# Altium PCB amino.PcbDoc (part 2 of 2)
Units mm, origin at the board's own origin, x right, y up, seen from the top; angles counter-clockwise.
Board outline 13 x 15 mm, 6 copper layers (L1 - SIG, L2 - GND, L3 - SIG, L4 - SIG, L5 - PWR, L6 - SIG), stack 0.739 mm thick; 48 components, 68 nets, 298 pads, 81 vias.
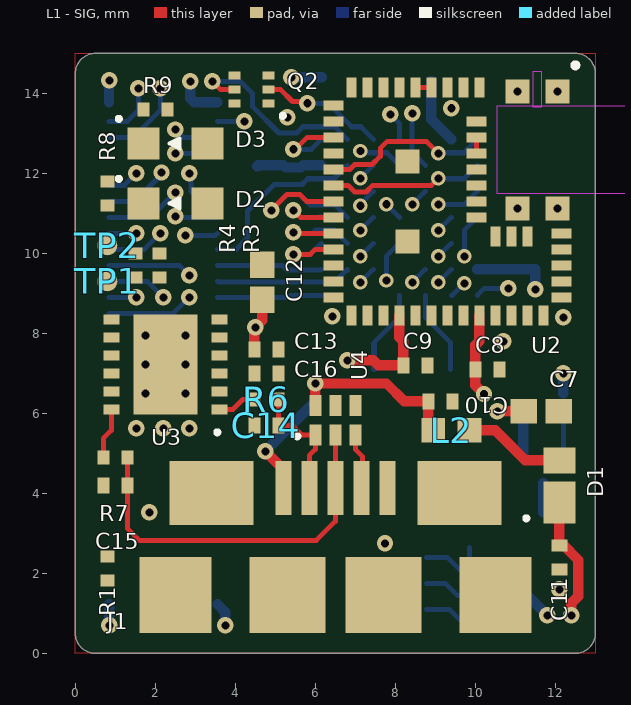
[diagram p0: L1 - SIG view]

## Part data (continued)
U4: "IC 4CH ESD SOLUTION W/CLAMP 6SON", Breakdown Voltage=24V, Capacitance=15pF, Manufacturer="Texas Instruments", Max Operating Temperature=85°C, Max Power Dissipation=60W, Min Breakdown Voltage=20V, Min Operating Temperature=-40°C, Package Quantity=5000, Peak Pulse Current=3A, Supplier Part Number 1=296-24244-1-ND, Supply Voltage=950mV, Test Current=1mA, Working Voltage=19V, ComponentLink1Description=https://datasheet.ciiva.com/361/tpd4s012-361280.pdf, ComponentLink1URL=https://datasheet.ciiva.com/361/tpd4s012-361280.pdf, ComponentLink2Description=https://datasheet.ciiva.com/4479/slvs928a-120928-4479536.pdf, ComponentLink2URL=https://datasheet.ciiva.com/4479/slvs928a-120928-4479536.pdf, ComponentLink3Description=https://datasheet.ciiva.com/25956/tpd4s012-25956897.pdf, ComponentLink3URL=https://datasheet.ciiva.com/25956/tpd4s012-25956897.pdf, ComponentLink4Description=https://datasheet.ciiva.com/1271/1719848-1271898.pdf, ComponentLink4URL=https://datasheet.ciiva.com/1271/1719848-1271898.pdf, ComponentLink5Description=https://datasheet.ciiva.com/46381/1857625-46381802.pdf, ComponentLink5URL=https://datasheet.ciiva.com/46381/1857625-46381802.pdf, ComponentLink6Description=https://datasheet.ciiva.com/28496/tpd4s012-28496124.pdf, ComponentLink6URL=https://datasheet.ciiva.com/28496/tpd4s012-28496124.pdf, ComponentLink7Description=https://datasheet.ciiva.com/1268/tpd4s012-1268381.pdf, ComponentLink7URL=https://datasheet.ciiva.com/1268/tpd4s012-1268381.pdf, ComponentLink8Description=https://datasheet.ciiva.com/361/tpd4s012-361278.pdf, ComponentLink8URL=https://datasheet.ciiva.com/361/tpd4s012-361278.pdf, ComponentLink9Description=https://datasheet.ciiva.com/15104/getdatasheetpartid-293634-15104046.pdf, ComponentLink9URL=https://datasheet.ciiva.com/15104/getdatasheetpartid-293634-15104046.pdf, ComponentLink10Description=https://datasheet.ciiva.com/22621/1857625-22621486.pdf, ComponentLink10URL=https://datasheet.ciiva.com/22621/1857625-22621486.pdf, ComponentLink11Description=https://datasheet.ciiva.com/361/tpd4s012-361279.pdf, ComponentLink11URL=https://datasheet.ciiva.com/361/tpd4s012-361279.pdf, Depth=1mm, Direction=Unidirectional, ESD Protection=Yes, Height=0.55mm, Interface=USB, Lead Free="Lead Free", Length=1.45mm, Manufacturer Part Number=TPD4S012DRYR, Number of Channels=4, Number of Circuits=4, Number of Pins=6, Packaging="Tape and Reel", Peak Pulse Power=60W, Polarity=Unidirectional, Pricing 1="1=0.77, 10=0.675, 100=0.5171, 500=0.4088, 1000=0.3271 (USD)", Radiation Hardening=No, REACH SVHC="No SVHC", Stock 1=85253, Supplier 1=Digi-Key, Termination=SMD/SMT, Width=1.05mm
U5: "STEP-DOWN CONVERTER MICROSIP", Manufacturer="Texas Instruments", Max Operating Temperature=125°C, Min Operating Temperature=-40°C, Supplier Part Number 1=296-47089-1-ND, Manufacturer Part Number=TPS82140SILT, Stock 1=0, Supplier 1=Digi-Key
U6: "IC REG LINEAR 3.3V 500MA 6TMLF", Dropout Voltage=160mV, Manufacturer=Microchip, Max Input Voltage=6V, Max Operating Temperature=125°C, Min Current Limit=600mA, Min Input Voltage=2.6V, Min Operating Temperature=-40°C, Nominal Output Voltage=3.3V, Output Current=500mA, Supplier Part Number 1=576-3680-1-ND, ComponentLink1Description=http://www.farnell.com/datasheets/1692673.pdf, ComponentLink1URL=http://www.farnell.com/datasheets/1692673.pdf, Lead Free="Lead Free", Manufacturer Part Number=MIC5353-3.3YMT-TR, Number of Pins=6, Number of Regulators=1, Output Voltage=3.3V, Packaging="Cut Tape", Pricing 1="1=0.36, 25=0.294, 100=0.273 (USD)", REACH SVHC="No SVHC", Stock 1=24501, Supplier 1=Digi-Key
Y1: library part "16MHz Resonator", "CER RES 16.0000MHZ 15PF SMD", Capacitance=15pF, Case/Package=SMD/SMT, Frequency=16MHz, Frequency Stability=0.3%, Frequency Tolerance=0.5%, Manufacturer=Murata, Max Operating Temperature=80°C, Min Operating Temperature=-20°C, Package Quantity=3000, Supplier Part Number 1=490-1198-1-ND, ComponentLink1Description=https://datasheet.ciiva.com/18183/getdatasheetpartid-152969-18183272.pdf, ComponentLink1URL=https://datasheet.ciiva.com/18183/getdatasheetpartid-152969-18183272.pdf, ComponentLink2Description=https://datasheet.ciiva.com/884/p16e-884477.pdf, ComponentLink2URL=https://datasheet.ciiva.com/884/p16e-884477.pdf, ComponentLink3Description=https://datasheet.ciiva.com/1361/1506176-1361293.pdf, ComponentLink3URL=https://datasheet.ciiva.com/1361/1506176-1361293.pdf, ComponentLink4Description=https://datasheet.ciiva.com/884/p16e-884478.pdf, ComponentLink4URL=https://datasheet.ciiva.com/884/p16e-884478.pdf, ComponentLink5Description=https://datasheet.ciiva.com/884/p16e-884479.pdf, ComponentLink5URL=https://datasheet.ciiva.com/884/p16e-884479.pdf, ComponentLink6Description=https://datasheet.ciiva.com/14132/ceralock-eng-bro-14132735.pdf, ComponentLink6URL=https://datasheet.ciiva.com/14132/ceralock-eng-bro-14132735.pdf, ComponentLink7Description=https://datasheet.ciiva.com/16216/l0430e-16216847.pdf, ComponentLink7URL=https://datasheet.ciiva.com/16216/l0430e-16216847.pdf, Composition=Ceramic, Contact Plating=Gold, Height=0.039inch, Impedance=40R, Lead Free="Lead Free", Length=0.126inch, Load Capacitance=15pF, Manufacturer Part Number=CSTCE16M0V53-R0, Number of Pins=3, Packaging="Tape and Reel", Pricing 1="1=0.5, 10=0.42, 50=0.3776, 100=0.3357, 500=0.3189, 1000=0.2686 (USD)", REACH SVHC="No SVHC", Self Resonant Frequency=16MHz, Stock 1=104178, Supplier 1=Digi-Key, Termination=SMD/SMT, Tolerance=0.5%, Width=0.051inch

## Via types
v1: diameter 0.406, hole 0.203, L1 - SIG to L6 - SIG, tented both sides, 63 vias
v2: diameter 0.356, hole 0.203, L1 - SIG to L6 - SIG, tented both sides, 18 vias

## Nets (pads, with @x,y where several pads share a name; then routed paths per layer and width w, separated by ;. In a path a pad name is that pad's centre, name@x,y a point inside that pad or via, vN(x,y) a via of type N, cw(c..) or ccw(c..) an arc to the next point about the centre after c; other vN are vias at no path point)
2G4RF_ANT: U2.4 U2.5 | length 0.4
  L1 - SIG w0.127: U2.5 U2.4
3V3: C1.2 C2.2 C3.2 C4.2 C7.2 C8.2 C9.2 C20.2 J2.14 L1.1 R1.2 U1.B7 U1.F1 U1.G6 U2.26 U2.31 U6.4 | length 13.8
  L1 - SIG w0.254: v1(6.8,7.325) 7.45,7.325 7.575,7.2 C9.2 8.2,7.8 8.1,7.9 U2.26 ; U2.31 10.1,7.8 10,7.7 C8.2 10,6.7 v1(10.22,6.48) ; v1(10.55,6.05) C7.2
  L6 - SIG w0.254: 3,4.1 J2.14 ; C2.2 4.575,12.2 5.204,12.2 5.261,12.143 5.64,12.143 5.696,12.2 U1.F1 ; v1(5.4,14.4) C1.2 ; C3.2 8.9,13.35 U1.G6 ; U1.B7 C4.2 v1(11.5,9.1) ; v1(10.55,6.05) 11.19,6.05 C20.2 U6.4
5V0: C11.2 C12.2 C13.2 C18.2 C19.2 D1.1 D2.2 D3.2 J2.9 J2.10 J2.11 J2.12 J2.13 R10.2 R11.2 U3.4 U5.4 U5.5 U6.1 U6.3 | length 6
  L1 - SIG w0.254: C13.2 4.475,8.125 v1(4.5,8.15) 4.675,8.325 C12.2 ; D1.1 C11.2 12.209,2.7 12.575,2.334 12.575,1.428 12.398,1.252 12.398,0.952 v1(12.4,0.95)
  L6 - SIG w0.254: R10.2 11.3,1.45 v1(11.8,0.95)
  other v1: 1.85,3.525
12V0: C17.2 J2.1 J2.2 J2.3 J2.4 U5.1 U5.2
AVCC: C6.2 L1.2 U1.A2
BT_IO0: J2.56 U2.33 | length 1
  L6 - SIG w0.127: v1@2.551,12.5 J2.56
  other v1: 2.5,12.5
BT_IO1: J2.57 U2.34 | length 2.1
  L6 - SIG w0.127: J2.57 1.45,12.9 2.125,13.575 v1(2.125,14.125)
BT_IO2: J2.58 U2.35 | length 1.1
  L6 - SIG w0.127: v1(2.5,13.095) 2.695,12.9 J2.58
BT_IO3: J2.59 U2.36 | length 1.4
  L6 - SIG w0.127: J2.59 1.3,13.3 1.575,13.575 v1(1.575,14.125)
BT_IO4: J2.60 U2.37 | length 0.7
  L6 - SIG w0.127: J2.60 v1(4.225,13.3)
BT_MCU_IO0: U1.C2 U2.18 | length 2.6
  L1 - SIG w0.127: v1(5.45,10.525) 5.475,10.5 U2.18 6.4,10.55 U2.18@6.376,10.526
  L6 - SIG w0.127: v1(5.45,10.525) 5.475,10.5 5.925,10.5 6.01,10.585 6.465,10.585 U1.C2
BT_MCU_IO1: U1.C1 U2.19 | length 1.9
  L1 - SIG w0.127: v1(5.45,9.975) 5.875,9.975 6,10.1 U2.19
  L6 - SIG w0.127: v1(5.45,9.975) 5.875,9.975 U1.C1
BT_RESETn: J2.28 U1.B6 U2.1 | length 0.5
  L6 - SIG w0.127: v2(9.075,9.275) U1.B6
BT_SWCLK: J2.25 U2.39
BT_SWDIO: J2.30 U2.40
BT_SWO: J2.27 U2.41
BT_UART_CTS: U1.D2 U2.16 | length 4.1
  L1 - SIG w0.127: v1(4.9,11.075) 4.9,11.082 5.287,11.469 5.613,11.469 5.782,11.3 U2.16
  L6 - SIG w0.127: v1(4.9,11.075) 4.9,11.082 5.287,11.469 5.613,11.469 5.867,11.215 6.485,11.215 U1.D2
BT_UART_RTS: U1.D1 U2.17 | length 1.9
  L1 - SIG w0.127: v1(5.45,11.075) 5.457,11.075 5.632,10.9 U2.17
  L6 - SIG w0.127: v1(5.45,11.075) 5.457,11.075 5.632,10.9 U1.D1 U1.D1@6.131,10.919
BT_UART_RX: U1.F7 U2.15 | length 4
  L1 - SIG w0.127: U2.15 6.815,11.7 6.983,11.532 7.267,11.532 7.435,11.7 8.9,11.7 v2(9.075,11.875)
  L6 - SIG w0.127: v2(9.075,11.875) 9.085,11.865 9.715,11.865 U1.F7
BT_UART_TX: U1.G7 U2.14 | length 4.3
  L1 - SIG w0.127: U2.14 6.865,12.1 6.983,12.218 7.418,12.218 7.626,12.426 7.626,12.626 7.8,12.8 8.775,12.8 v2(9.075,12.5)
  L6 - SIG w0.127: v2(9.075,12.5) 9.09,12.515 9.715,12.515 U1.G7
BT_WAKEUP: U1.G1 U2.12 | length 1.9
  L1 - SIG w0.127: v1(5.45,12.601) 5.501,12.601 5.8,12.9 U2.12
  L6 - SIG w0.127: v1(5.45,12.601) 5.901,12.601 U1.G1
BYP: C21.2 U6.6 | length 0.9
  L6 - SIG w0.127: U6.6 C21.2
FB: R11.1 R12.2 U5.6 | length 1.8
  L6 - SIG w0.127: U5.6 9.3,2.4 9.65,2.05 R12.2 R11.1
GND: C1.1 C2.1 C3.1 C4.1 C6.1 C7.1 C8.1 C9.1 C10.1 C11.1 C12.1 C13.1 C14.1 C15.1 C16.1 C17.1 C18.1 C19.1 C20.1 C21.1 C22.1 J1.5 J1.6 J2.5 J2.6 J2.7 J2.8 J2.15 J2.16 J2.17 J2.18 J2.19 J2.20 J2.22 J2.23 J2.26 J2.29 J2.32 J2.33 J2.36 J2.52 J2.53 J2.54 J2.55 J2.61 J2.62 J2.63 J2.64 Q2.1 Q2.4 R12.1 U1.A3 U1.B4 U1.C5 U1.C7 U1.D5 U1.E1 U1.E2 U1.E4 U1.G5 U2.2 U2.3 U2.6 U2.25 U2.27 U2.29 U2.32 U2.47 U2.50 U2.51 U2.52 U2.53 U2.54 U2.55 U2.56 U3.5 U3.13 U4.4 U5.3 U5.9 U6.2 U6.7 Y1.2 | length 4.2
  L6 - SIG w0.254: J2.61 0.85,1.22 v1(0.85,0.7) ; J2.63 0.845,14.32 v1(0.85,14.325) ; v1(2.875,14.3) 2.875,13.875 2.975,13.775 J2.64 ; J2.62 3.75,1.03 v1(3.75,0.7) ; U5.9 7.75,2.065 7.785,2.065 U5.9@7.75,2.1 ; U6.2 U6.7 ; C21.1 v1(12.2,7)
  other v1: 12.1,1.6 7.74,2.75 1.75,6.5 2.75,6.5 1.75,7.225 2.75,7.225 10.7,7.8 1.75,7.95 2.75,7.95 12.2,8.4 6.425,8.425 11.05,11.125 12.05,11.125 5.3,13.4 9.4,13.626 11.05,14.05 12.05,14.05
HFXO: U2.48 U2.49 | length 0.4
  L1 - SIG w0.127: U2.48 U2.49
MCU_D_N: J2.34 U1.E7 | length 1.1
  L6 - SIG w0.127: v2(9.075,11.225) 9.725,11.225 U1.E7
MCU_D_P: J2.31 U1.D6 | length 0.5
  L6 - SIG w0.127: v2(9.075,10.575) U1.D6
MCU_IO0: J2.35 U1.B3 | length 2.6
  L6 - SIG w0.127: J2.35 2.45,8.5 v1(2.85,8.9) ; v2(7.125,9.275) U1.B3
MCU_IO1: J2.37 U1.C3 | length 1.1
  L6 - SIG w0.127: J2.37 v1@1.45,8.9 ; v2(7.125,9.925) U1.C3
  other v1: 1.525,8.9
MCU_IO2: J2.38 U1.A1 | length 2.6
  L6 - SIG w0.127: J2.38 5.325,8.9 5.375,8.95 U1.A1
MCU_IO3: J2.39 U1.E5 | length 2
  L6 - SIG w0.127: J2.39 1.8,9.3 v1(2.2,8.9) ; v2(8.425,11.225) U1.E5
MCU_IO4: J2.40 U1.B2 | length 3.4
  L6 - SIG w0.127: J2.40 3.57,9.285 6.485,9.285 U1.B2 U1.B2@6.8,9.575
MCU_IO5: J2.41 U1.D4 | length 2.6
  L6 - SIG w0.127: J2.41 2.6,9.7 v1(2.85,9.45) ; v2(7.775,11.226) U1.D4
MCU_IO6: J2.42 U1.B1 | length 2.7
  L6 - SIG w0.127: J2.42 5.168,9.7 5.287,9.581 6.131,9.581 U1.B1
MCU_IO7: J2.43 U1.C4 | length 2.6
  L6 - SIG w0.127: J2.43@0.889,10.056 J2.43 1.725,10.1 v1(2.125,10.5) ; v2(7.775,9.318) 7.775,9.925 U1.C4
MCU_IO8: J2.44 U1.F2 | length 4.5
  L6 - SIG w0.127: J2.44 4.025,10.1 4.306,10.381 4.306,11.056 4.973,11.723 5.668,11.723 5.81,11.865 6.465,11.865 U1.F2
MCU_IO9: J2.45 U1.D3 | length 1.1
  L6 - SIG w0.127: J2.45 v1(1.525,10.5) ; v2(7.125,10.575) U1.D3
MCU_IO10: J2.46 U1.D7 | length 1.9
  L6 - SIG w0.127: v1(2.75,10.45) 3.505,10.45 J2.46 ; v2(9.725,9.925) 9.725,10.575 U1.D7
MCU_IO11: J2.47 U1.A7 | length 2.8
  L6 - SIG w0.127: J2.47 1.88,10.9 v1(2.5,11.52) ; U1.A7 10.225,9.125 v1(10.825,9.125)
MCU_IO12: J2.48 U1.F5 | length 2.5
  L6 - SIG w0.127: v1(2.5,10.925) 2.525,10.9 J2.48 J2.48@3.574,10.919 ; v1(8.425,13.5) 8.415,13.49 8.415,12.535 U1.F5
MCU_IO13: J2.49 U1.E3 | length 2.1
  L6 - SIG w0.127: J2.49 1.486,11.3 2.156,11.97 v1@2.156,11.906 ; v2(7.125,11.189) 7.125,11.225 U1.E3
  other v1: 2.156,12.02
MCU_IO14: J2.50 U1.F3 | length 1.7
  L6 - SIG w0.127: v1(2.85,12) 2.894,11.956 2.894,11.556 3.15,11.3 J2.50 ; v2(7.125,11.875) U1.F3
MCU_IO15: J2.51 U1.C6 | length 1.3
  L6 - SIG w0.127: J2.51 1.225,11.7 v1(1.525,12) ; v2(9.075,9.925) U1.C6
NetD1_2: D1.2 L2.2 | length 2.6
  L1 - SIG w0.254: L2.2 10.5,5.575 11.25,4.825 D1.2
NetD2_1: D2.1 R8.2
NetD3_1: D3.1 R9.2 | length 0
NetQ2_3: Q2.3 R9.1
NetQ2_6: Q2.6 R8.1
NetTP3_1: U3.6
PDI_CLK: J2.24 R1.1 U1.B5 | length 0.5
  L6 - SIG w0.127: v2(8.425,9.275) U1.B5
PDI_DATA: J2.21 U1.A6 | length 0.4
  L6 - SIG w0.127: U1.A6 9.425,8.95 v2(9.725,9.25)
PG: R10.1 U5.7 | length 1.2
  L6 - SIG w0.127: U5.7 9.25,1.75 9.55,1.45 R10.1
SS: C22.2 U5.8 | length 1.2
  L6 - SIG w0.127: U5.8 9.35,1.1 9.6,0.85 C22.2
USB_D_N: C14.2 J1.2 R6.1 U4.1 | length 3.1
  L1 - SIG w0.127: R6.1 C14.2 5.425,5.7 5.67,5.455 U4.1 6,5.1 5.85,4.95 J1.2
USB_D_P: C15.2 J1.3 R7.1 U4.2 | length 9.5
  L1 - SIG w0.127: R7.1 C15.2 1.3,3.125 1.6,2.825 6.025,2.825 6.5,3.3 J1.3 U4.2
USB_DR_N: R6.2 U3.1 | length 1
  L1 - SIG w0.127: U3.1@3.6,6.095 3.937,6.095 4.192,6.35 R6.2
USB_DR_P: R7.2 U3.12 | length 1.3
  L1 - SIG w0.127: R7.2 0.7,5.375 0.9,5.575 U3.12@0.9,6.095
USB_ID: J1.4 U4.3 | length 1.4
  L1 - SIG w0.127: U4.3 7,5.1 7.175,4.925 7.175,4.162 J1.4
USB_UART_CTS#: TP2.1 U3.11
USB_UART_RTS#: TP1.1 U3.8
USB_UART_RXD: R4.1 U1.G4 U3.10 | length 0.7
  L6 - SIG w0.127: v1(7.875,13.475) 8.1,13.25 U1.G4 U1.G4@8.075,12.85
USB_UART_TXD: R3.1 U1.F4 U3.7 | length 1.1
  L6 - SIG w0.127: v2(7.125,12.561) 7.125,12.53 7.14,12.515 7.785,12.515 U1.F4
USER_LED0: Q2.2 U1.G3 | length 3.1
  L1 - SIG w0.127: Q2.2 5.125,14.1 5.431,13.794 5.757,13.794 v1(5.8,13.751)
  L6 - SIG w0.127: v1(5.8,13.751) 6.324,13.751 6.91,13.165 7.135,13.165 U1.G3
USER_LED1: Q2.5 U1.G2 | length 4.9
  L1 - SIG w0.127: v1(3.425,14.3) 3.625,14.1 Q2.5
  L6 - SIG w0.127: v1(3.425,14.3) 4.125,14.3 4.425,14 4.425,13.675 5.094,13.006 5.533,13.006 5.692,13.165 6.485,13.165 U1.G2
VBUS: C10.2 J1.1 L2.1 U4.6 | length 7.7
  L1 - SIG w0.254: v1(4.75,5.05) 5.2,4.6 J1.1 ; U4.6@5.975,6.22 U4.6 6,6.696 v1@6.05,6.746 ; v1(6,6.746) v1@6.05,6.746 ; L2.1 8.825,5.695 C10.2 8.225,6.3 7.779,6.746 v1@6.05,6.746
  L6 - SIG w0.254: v1(4.75,5.05) 6,6.3 v1(6,6.746)
VCCIO: C16.2 R3.2 R4.2 U3.2 U3.3 U3.9
XTALI: U1.A5 Y1.1 | length 2.1
  L6 - SIG w0.127: U1.A5 8.75,8.4 9.375,7.775 Y1.1
XTALO: U1.A4 Y1.3 | length 2.8
  L6 - SIG w0.127: Y1.3@7.45,7.1 Y1.3@7.45,7.75 ; Y1.3 7.475,7.775 8.1,8.4 U1.A4
pads on no net: U1.E6 U1.F6 U2.7 U2.8 U2.9 U2.10 U2.11 U2.13 U2.20 U2.21 U2.22 U2.23 U2.24 U2.28 U2.30 U2.38 U2.42 U2.43 U2.44 U2.45 U2.46 U4.5 U6.5
copper on no net:
  other v1: 1.525,5.625 2.2,5.625 2.85,5.625

## Polygon pours and split planes (outlines as drawn)
GND on L1 - SIG "GND_L01_P030" (solid, remove dead copper, shelved, pour order 30): 0,15 13,15 13,0 0,0
GND on L6 - SIG "GND_L06_P020" (solid, remove dead copper, shelved, pour order 20): 12.05,1.3 13,1.3 13,2.35 11.7,2.35 11.7,1.65
5V0 on L6 - SIG "5V0_L06_P018" (solid, shelved, pour order 18): 10.75,0.75 10.85,0.65 12.6,0.65 12.7,0.75 12.7,1.15 12.6,1.25 11.8,1.25 11.7,1.35 11.7,2.8 10.75,2.8
12V0 on L6 - SIG "12V0_L06_P026" (solid, remove dead copper, shelved, pour order 26): 3.65,1.5 0.5,1.5 0.4,1.6 0.4,2.15 0.5,2.25 3.65,2.25
12V0 on L6 - SIG "12V0_L06_P024" (solid, remove dead copper, shelved, pour order 24): 3.95,1.5 4.4,1.05 4.4,0.8 4.5,0.7 7,0.7 7.1,0.8 7.1,1.95 6.985,2.065 4.085,2.065 3.902,2.248 3.05,2.248 3.05,1.6 3.15,1.5
GND on L6 - SIG "GND_L06_P028" (solid, remove dead copper, shelved, pour order 28): 4.3,3.05 4.4,3.15 4.4,3.75 4.5,3.85 5.7,3.85 5.8,3.75 5.8,2.8 5.9,2.7 7.69,2.7 7.74,2.75 7.75,2.74 7.75,2.065 4.185,2.065 3.95,2.3 2.15,2.3 2.05,2.4 2.05,2.95 2.15,3.05
5V0 on L6 - SIG "5V0_L06_P022" (solid, remove dead copper, shelved, pour order 22): 6.4,2.75 10.1,2.75 10.2,2.65 10.2,2.45 10.3,2.35 11.15,2.35 11.438,2.638 11.438,3.882 9.368,3.882 9.3,3.95 9.3,5.35 9.2,5.45 8.25,5.45 8.15,5.35 8.15,3.5 8.05,3.4 6.4,3.4 6.3,3.3 6.3,2.85
5V0 on L6 - SIG "5V0_L06_P016" (solid, remove dead copper, shelved, pour order 16): 6.273,2.7 6.323,2.75 9.35,2.75 9.5,2.9 10.2,2.9 10.3,2.8 10.3,2.5 10.4,2.4 10.75,2.4 10.75,2.2 10.95,2 11.6,2 11.7,2.1 11.7,2.8 11.45,3.05 11.45,3.85 11.35,3.95 9.95,3.95 9.85,4.05 9.85,5.75 9.75,5.85 7.95,5.85 7.85,5.75 7.85,4 7.25,3.4 6.25,3.4 6.1,3.25 6.1,2.85 6.2,2.75 6.5,2.75
5V0 on L6 - SIG "5V0_L06_P002" (solid, shelved, pour order 2): 11.25,3.95 12.35,3.95 12.45,3.85 12.45,2.9 12.35,2.8 11.3,2.8
GND on L6 - SIG "GND_L06_P014" (solid, remove dead copper, shelved, pour order 14): 13,1.95 13,4.35 12.8,4.55 10.75,4.55 10.65,4.65 10.65,6.4 10.75,6.5 11.55,6.5 11.65,6.6 11.65,7.3 11.55,7.4 10.05,7.4 9.95,7.3 9.95,4.15 10.05,4.05 12.25,4.05 12.55,3.75 12.55,2.9 12.45,2.8 11.763,2.8 11.673,2.71 11.673,2.09 11.813,1.95
GND on L6 - SIG "GND_L06_P032" (solid, remove dead copper, shelved, pour order 32): 0,15 13,15 13,0 0,0
5V0 on L6 - SIG "5V0_L06_P000" (solid, remove dead copper, shelved, pour order 0): 0.5,4.3 2.2,4.3 2.6,3.9 4,3.9 4.1,3.8 4.1,3.2 4,3.1 2.1,3.1 1.8,2.8 1.5,2.8 1.2,3.1 0.5,3.1 0.4,3.2 0.4,4.2
GND on L2 - GND (split plane): 12.564,14.737 12.623,14.713 12.674,14.674 12.713,14.623 12.737,14.564 12.745,14.507 12.744,14.5 12.744,0.5 12.745,0.493 12.737,0.436 12.713,0.377 12.674,0.326 12.623,0.287 12.564,0.263 12.507,0.255 12.5,0.256 0.5,0.256 0.493,0.255 0.436,0.263 0.377,0.287 0.326,0.326 0.287,0.377 0.263,0.436 0.255,0.493 0.256,0.5 0.256,14.5 0.255,14.507 0.263,14.564 0.287,14.623 0.326,14.674 0.377,14.713 0.436,14.737 0.493,14.745 0.5,14.744 12.5,14.744 12.507,14.745
3V3 on L5 - PWR (split plane): 12.564,14.737 12.623,14.713 12.674,14.674 12.713,14.623 12.737,14.564 12.745,14.507 12.744,14.5 12.744,3.592 3.08,3.592 2.392,4.28 2.392,9.22 4.136,10.964 4.166,11.004 4.186,11.05 4.192,11.1 4.192,14.744 12.5,14.744 12.507,14.745
5V0 on L5 - PWR (split plane): 0.5,14.744 3.808,14.744 3.808,11.18 2.064,9.436 2.034,9.396 2.014,9.35 2.008,9.3 2.008,4.2 2.014,4.15 2.034,4.104 2.064,4.064 2.864,3.264 2.904,3.234 2.95,3.214 3,3.208 12.744,3.208 12.744,0.5 12.745,0.493 12.737,0.436 12.713,0.377 12.674,0.326 12.623,0.287 12.564,0.263 12.507,0.255 12.5,0.256 0.5,0.256 0.493,0.255 0.436,0.263 0.377,0.287 0.326,0.326 0.287,0.377 0.263,0.436 0.255,0.493 0.256,0.5 0.256,14.5 0.255,14.507 0.263,14.564 0.287,14.623 0.326,14.674 0.377,14.713 0.436,14.737 0.493,14.745

## Other copper
L5 - PWR (plane layer: these items are gaps in the copper):
  lines w0.381: 4,15 4,11.1 2.2,9.3 2.2,4.2 3,3.4 13,3.4

## Silkscreen, mask and mechanical layers (free items; w line width, h text height)
Bottom Overlay:
  circle w0.1: c11.7,0.7 r0.4
  circle w0.1: c12,14.2 r0.4
  lines w0.1: 10.8,0.7 11.3,0.7 ; 10.8,0.5 10.8,3 ; 10.8,0.5 10.8,3 ; 10.8,0.5 9.6,0.5 9.6,2.7 9.6,3 10.8,3
  text "A" at 11.875,14 h0.4
  text "A" at 11.575,0.5 h0.4

## Text inside footprints (layer, text, board x,y; h text height)
J1: Mechanical 2 "PCB Edge" at 14.5,-0.7 h1.52
J2: Bottom Overlay "1" at 1,0.7 h0.5 r90